# Altium PCB PCB.PcbDoc (part 1 of 2)
Units mm, origin at the board's own origin, x right, y up, seen from the top; angles counter-clockwise.
Board outline 81.5 x 81.5 mm, 2 copper layers (Top Layer, Bottom Layer), stack 1.571 mm thick; 125 components, 80 nets, 407 pads, 356 vias.
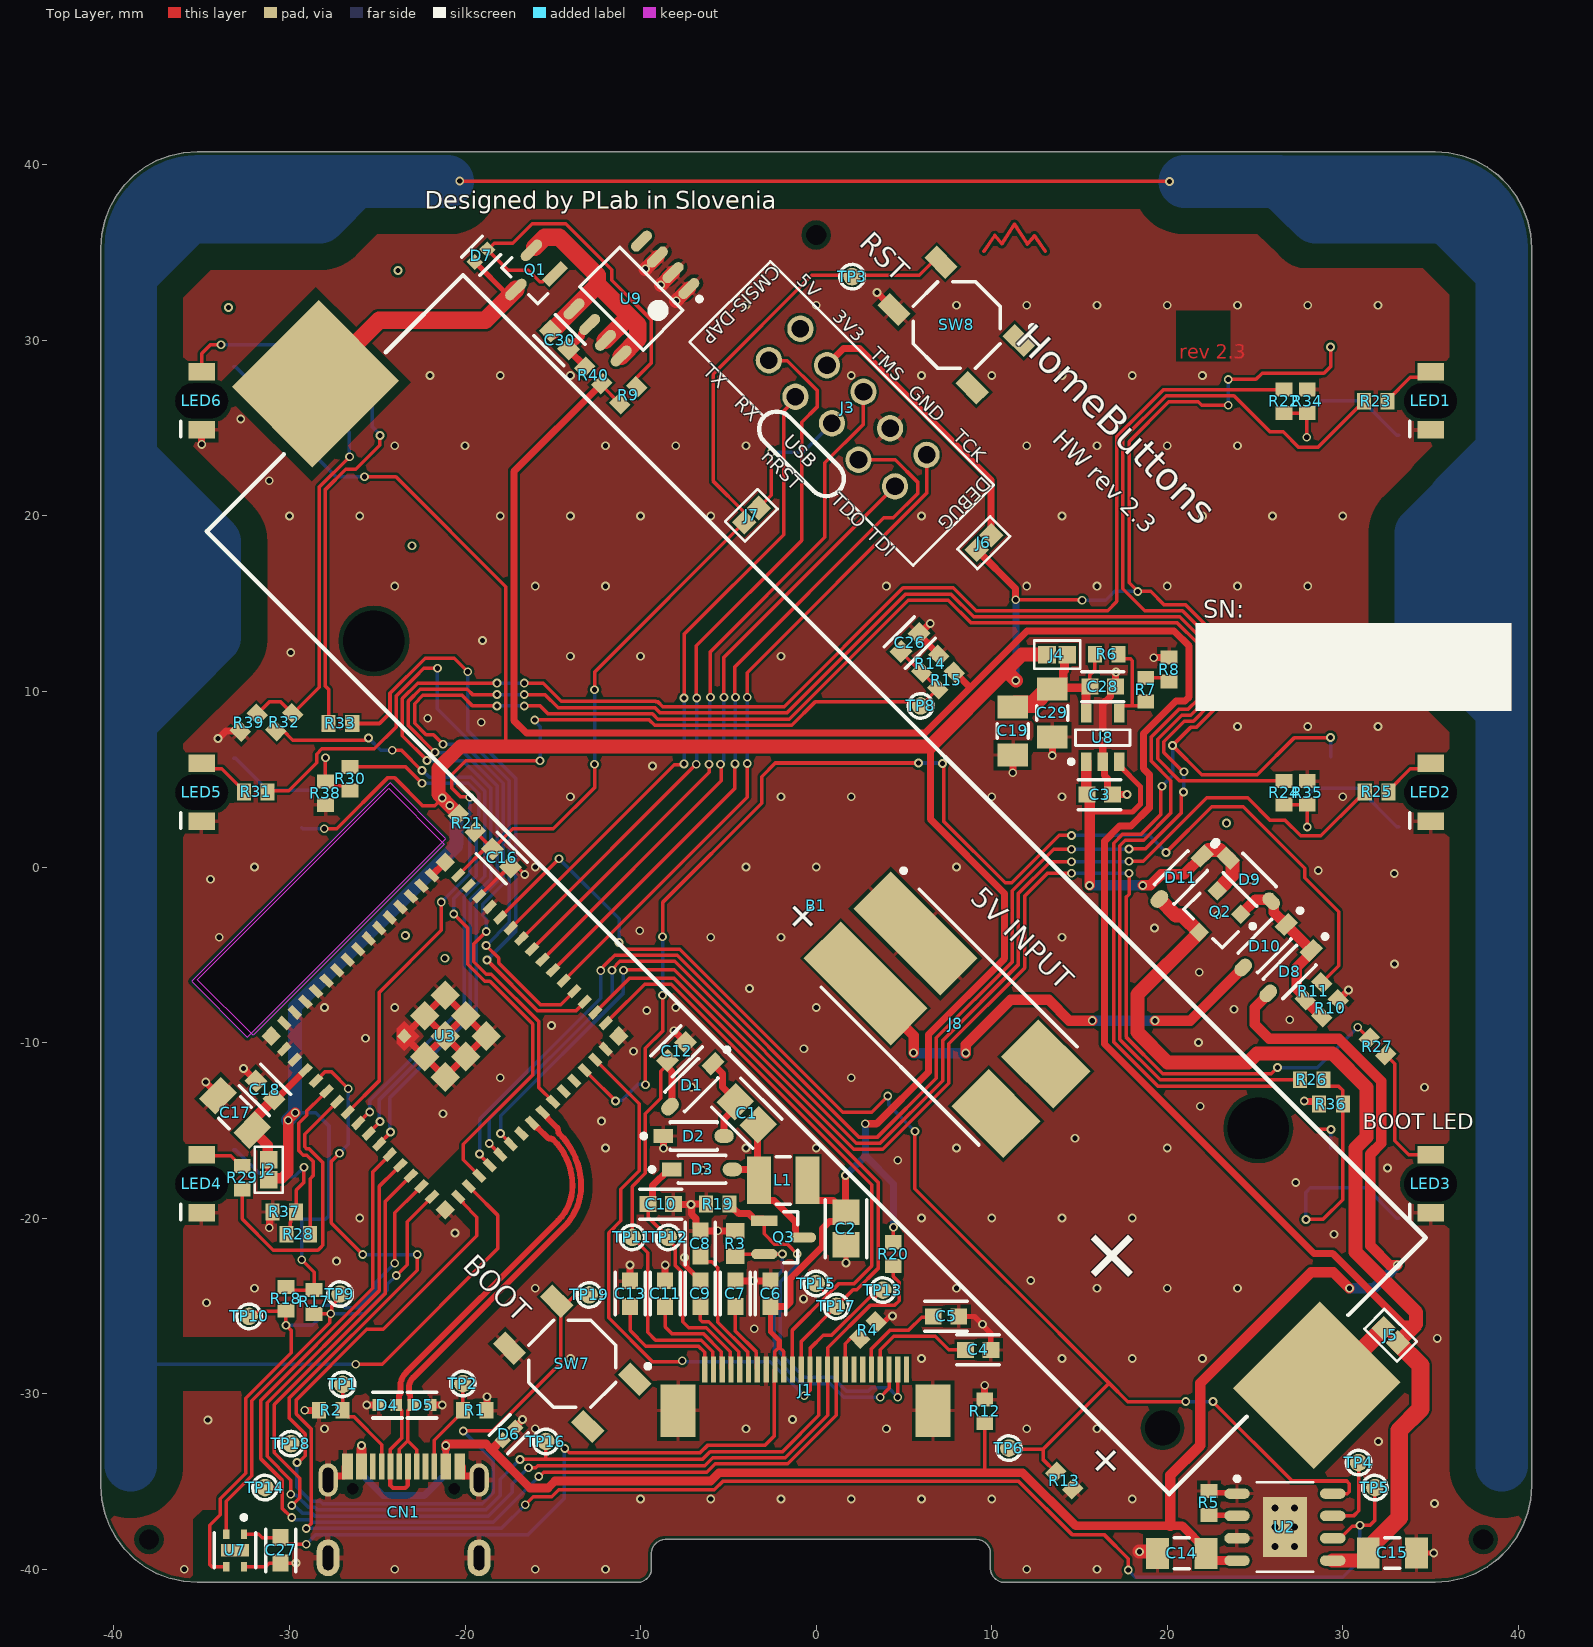
[diagram p0: Top Layer view]
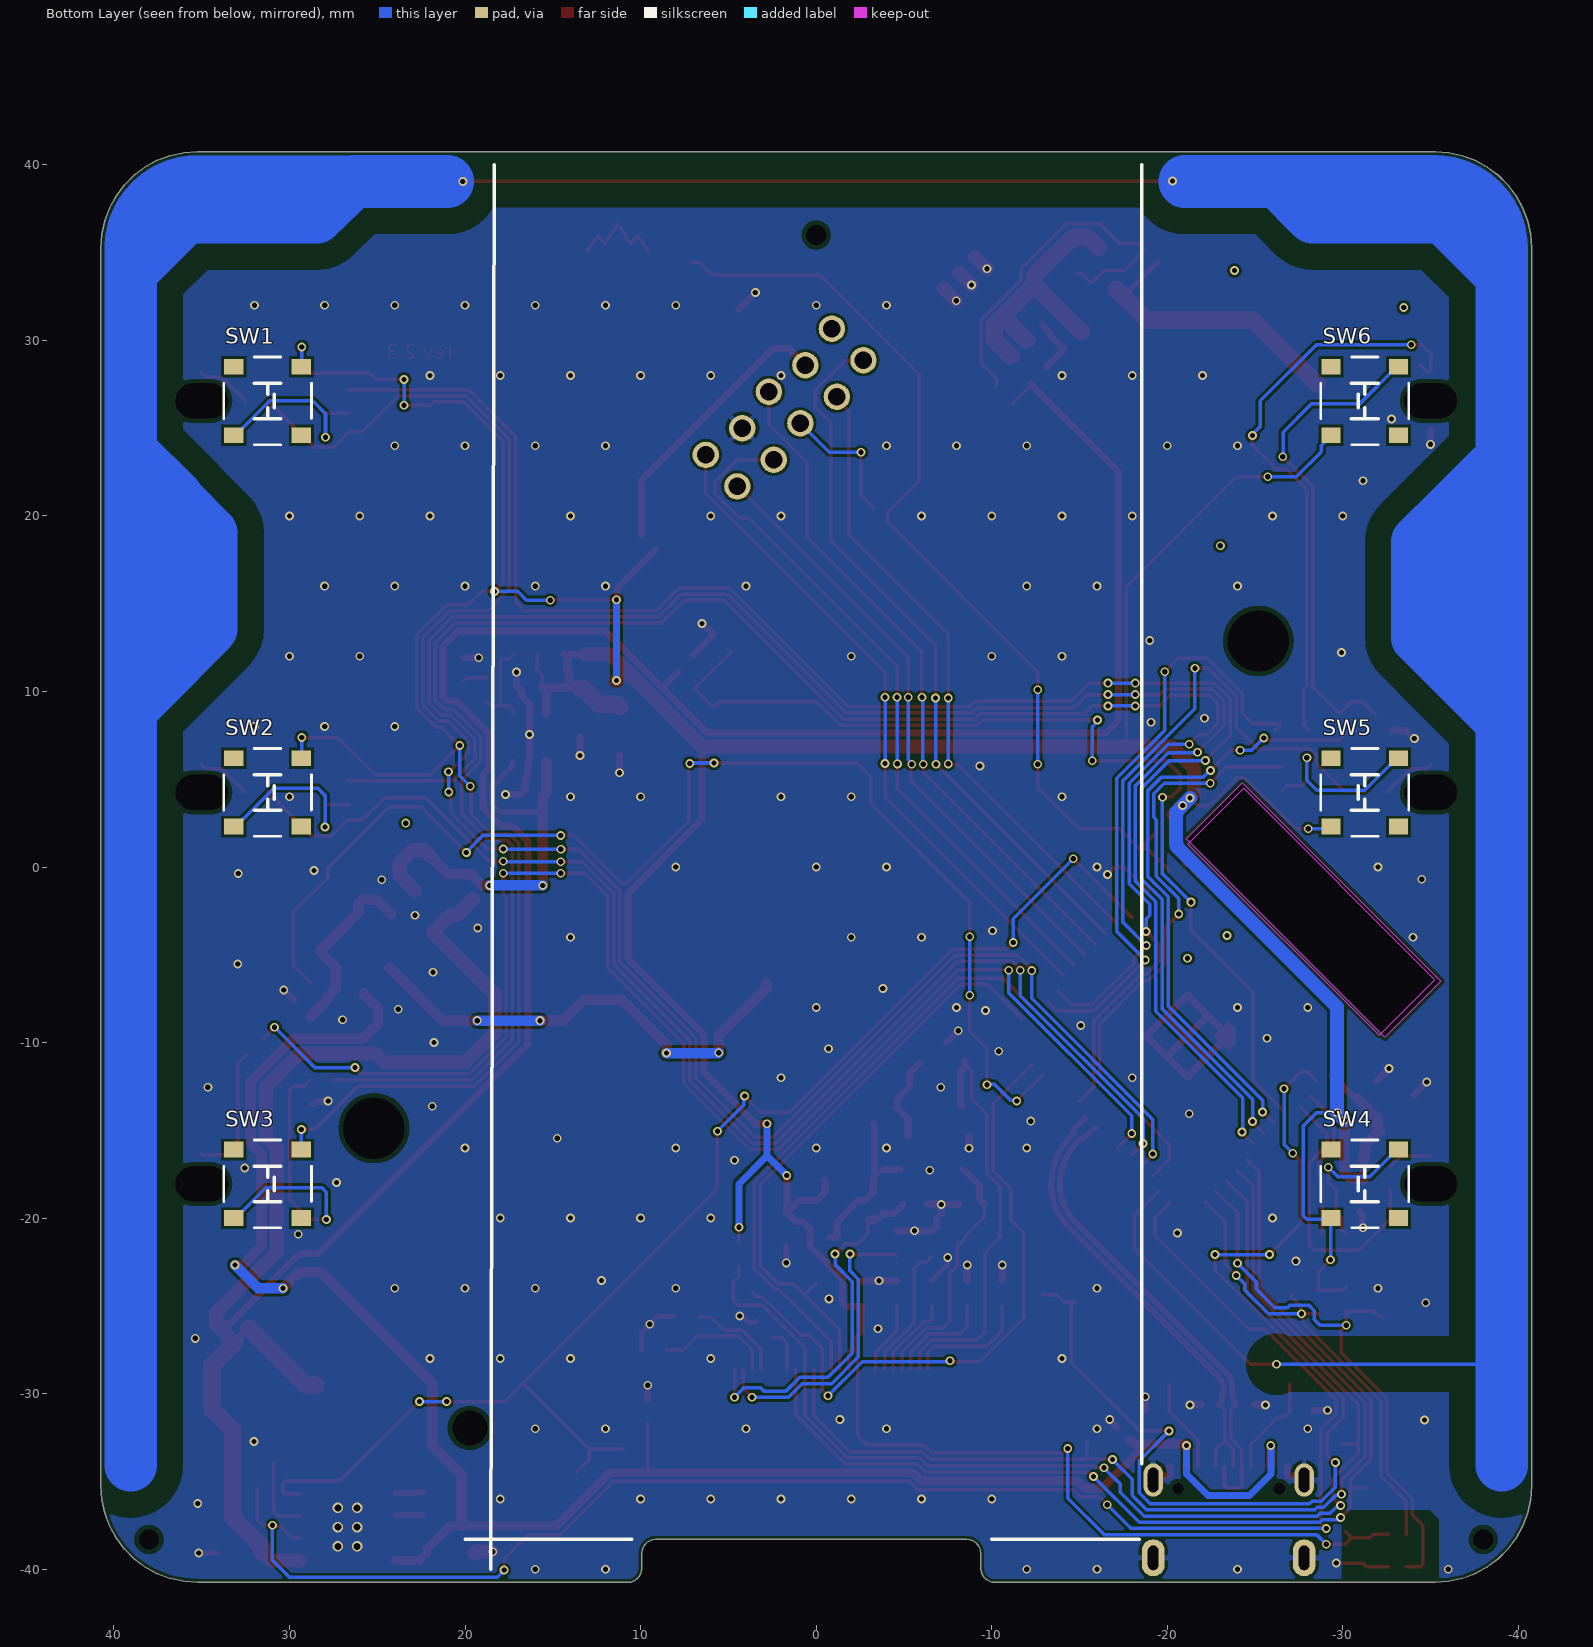
[diagram p1: Bottom Layer view, seen from below]
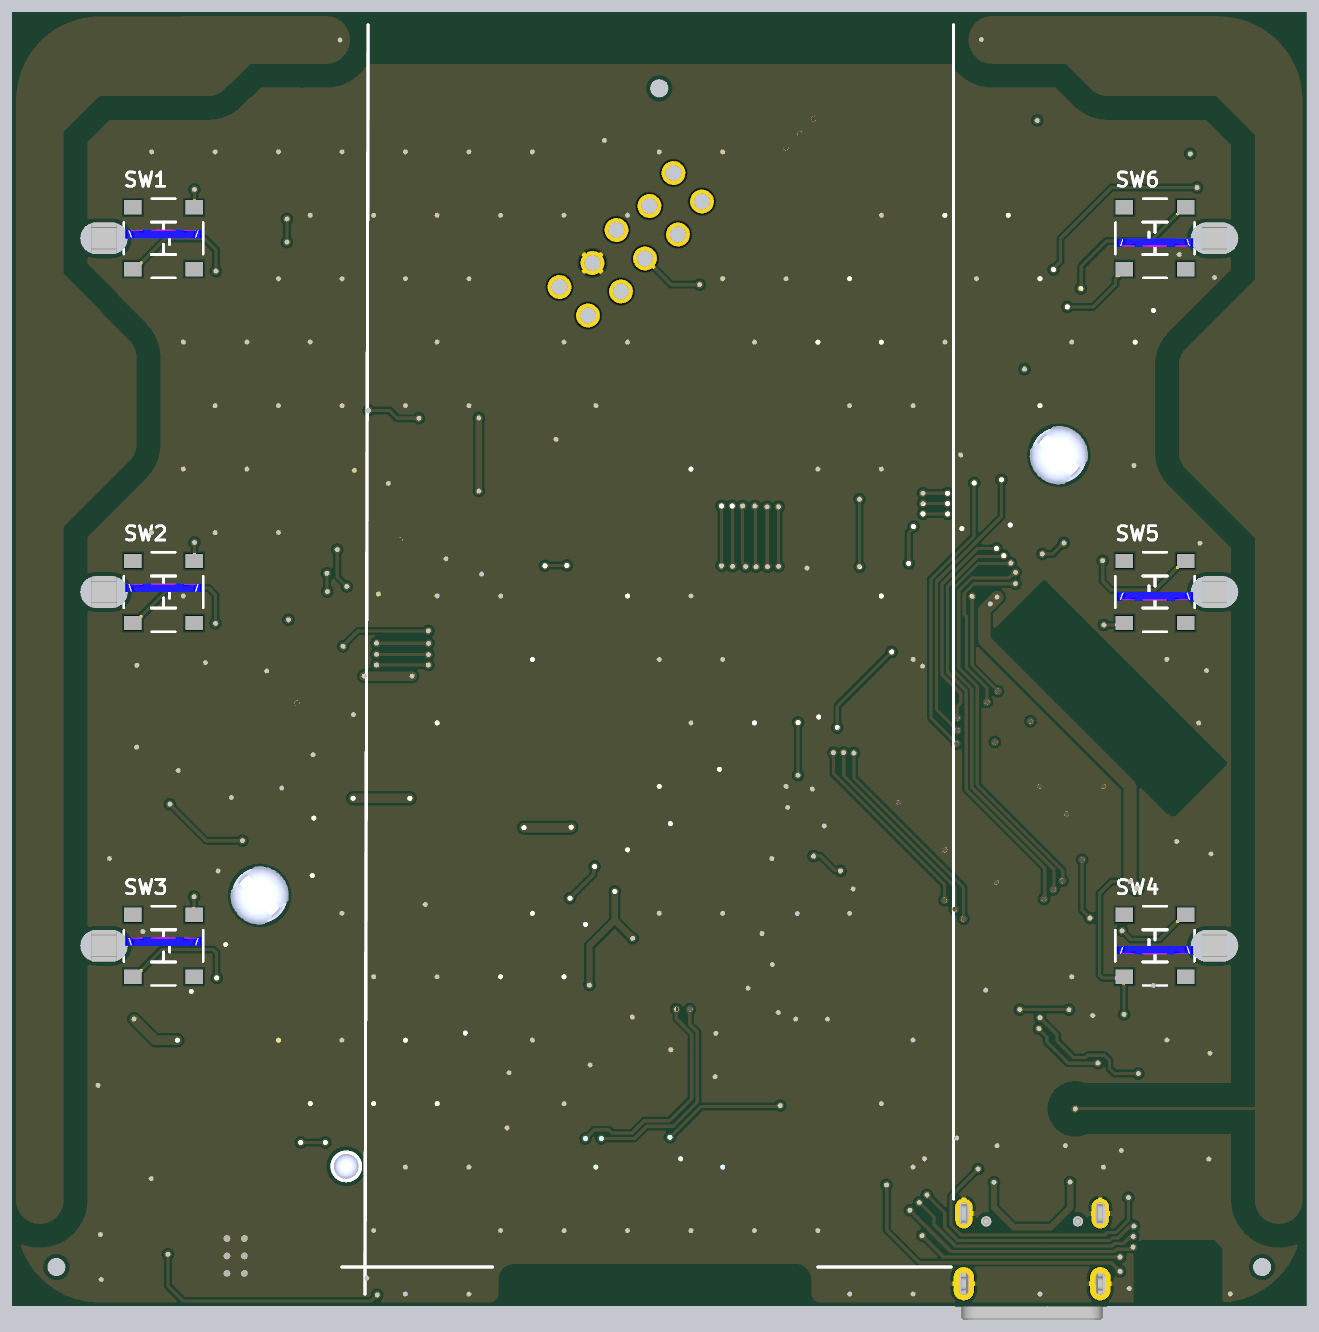
[diagram p3: 3D render of the assembled board from below, using the file's embedded part models]

## Layer stack, top to bottom
Top Solder: solder mask 0.0102, Solder Resist, Dk 3.5
Top Layer: signal copper 0.0356
Dielectric 1: dielectric 1.5, FR-4, Dk 4.8
Bottom Layer: signal copper 0.0356
Bottom Solder: solder mask 0.0102, Solder Resist, Dk 3.5

## Board outline
-35.25,-40.75 -10.18,-40.75 -10.002,-40.73 -9.833,-40.671 -9.681,-40.575 -9.555,-40.449 -9.459,-40.297 -9.4,-40.128 -9.38,-39.95 -9.38,-39.1 -9.36,-38.922 -9.301,-38.753 -9.205,-38.601 -9.079,-38.475 -8.927,-38.379 -8.758,-38.32 -8.58,-38.3 9.13,-38.3 9.308,-38.32 9.477,-38.379 9.629,-38.475 9.755,-38.601 9.851,-38.753 9.91,-38.922 9.93,-39.1 9.93,-39.95 9.95,-40.128 10.009,-40.297 10.105,-40.449 10.231,-40.575 10.383,-40.671 10.552,-40.73 10.73,-40.75 35.25,-40.75 36.033,-40.694 36.8,-40.527 37.535,-40.253 38.224,-39.877 38.852,-39.407 39.407,-38.852 39.877,-38.224 40.253,-37.535 40.527,-36.8 40.694,-36.033 40.75,-35.25 40.75,35.25 40.694,36.033 40.527,36.8 40.253,37.535 39.877,38.224 39.407,38.852 38.852,39.407 38.224,39.877 37.535,40.253 36.8,40.527 36.033,40.694 35.25,40.75 -35.25,40.75 -36.033,40.694 -36.8,40.527 -37.535,40.253 -38.224,39.877 -38.852,39.407 -39.407,38.852 -39.877,38.224 -40.253,37.535 -40.527,36.8 -40.694,36.033 -40.75,35.25 -40.75,-35.25 -40.694,-36.033 -40.527,-36.8 -40.253,-37.535 -39.877,-38.224 -39.407,-38.852 -38.852,-39.407 -38.224,-39.877 -37.535,-40.253 -36.8,-40.527 -36.033,-40.694
cut-out: -32.4,-9.7 -21.086,1.614 -24.268,4.796 -35.582,-6.518

## Design rules (kind name [scope] priority, off if disabled: settings)
BoardOutlineClearance [All] p1: gap=0.2 ignorepadtopadclearanceinfootprint=FALSE
Clearance "proximity track clearance" [InNet('PROXIMITY') vs InNet('GND')] p1: gap=1.5 ignorepadtopadclearanceinfootprint=TRUE
Clearance "usb dif pair track clearance" [(InNet('USB_N') OR InNet('USB_P')) vs InNet('GND')] p2: gap=0.5 ignorepadtopadclearanceinfootprint=TRUE
Clearance [All] p3: gap=0.15 ignorepadtopadclearanceinfootprint=FALSE except(0.25: Arc-Hole Track-Hole THPad-Hole Via-Hole Fill-Hole Poly-Hole Region-Hole Text-Hole)
ComponentClearance [All] p1: gap=0 collisioncheckmode=3 verticalgap=0 showdistances=TRUE
DiffPairsRouting [All] p1: maxlimit=0.15 minlimit=0.15 mostfreqgap=0.15 toplayer_minwidth=0.2 toplayer_maxwidth=0.335 toplayer_prefwidth=0.335 bottomlayer_minwidth=0.2 bottomlayer_maxwidth=0.335 bottomlayer_prefwidth=0.335 impedanceprofiledriven=TRUE impedanceprofileid={C2F5FF65-82FF-485B-A6D6-999E515194F7} impedanceprofilevalue=100.000000 maxuncoupledlength=12.7
Height [All] p1: minheight=0 maxheight=1816.048 prefheight=12.7
HoleSize [All] p1: absolutevalues=TRUE maxlimit=6.3 minlimit=0.3 maxpercent=80.000 minpercent=20.000
HoleToHoleClearance [All] p1: gap=0.25 allowstackedmicrovias=FALSE
MinimumAnnularRing [All] p1: minimumring=0.076
MinimumSolderMaskSliver [All] p1: minsoldermaskwidth=0
PasteMaskExpansion [All] p1: expansion=0 percent=-10.000000
PlaneClearance [All] p1: clearance=0.102
PlaneConnect PlaneConnectPowerPads [InPadClass('PowerPads')] p1: planeconnectstyle=Direct reliefexpansion=0.508 reliefentries=4 reliefconductorwidth=0.254 reliefairgap=0.254
PlaneConnect [All] p2: pad.planeconnectstyle=Relief pad.reliefexpansion=0.3 pad.reliefentries=4 pad.reliefconductorwidth=0.102 pad.reliefairgap=0.102 via.planeconnectstyle=Direct via.reliefexpansion=0.3 via.reliefentries=4 via.reliefconductorwidth=0.127 via.reliefairgap=0.127
PolygonConnect PolygonConnectPowerPads [All vs (InPadClass('PowerPads'))] p1: connectstyle=Direct reliefconductorwidth=0.254 reliefentries=4 polygonreliefangle="90 Angle" airgapwidth=0.254
PolygonConnect [All] p2: thpad.connectstyle=Relief thpad.reliefconductorwidth=0.3 thpad.reliefentries=4 thpad.polygonreliefangle="90 Angle" thpad.airgapwidth=0.2 smdpad.connectstyle=Relief smdpad.reliefconductorwidth=0.2 smdpad.reliefentries=4 smdpad.polygonreliefangle="90 Angle" smdpad.airgapwidth=0.2 via.connectstyle=Direct via.reliefconductorwidth=0.127 via.reliefentries=4 via.polygonreliefangle="90 Angle" via.airgapwidth=0.127
RoutingVias [All] p1: holewidth=0.3 width=0.5 viastyle="Through Hole" minholewidth=0.2 minwidth=0.45 maxholewidth=6.3 maxwidth=6.55
SilkToSilkClearance [All] p1: silktosilkclearance=0
SilkToSolderMaskClearance [IsPad] p1: minsilkscreentomaskgap=0.08 clearancetoexposedcopper=TRUE
SolderMaskExpansion SolderMaskExpansion_VIAS [IsVia] p1: expansion=0.102 istentingtop=TRUE // SolderMask expansion for vias (defines tenting)
SolderMaskExpansion [All] p2: expansion=0.102 istentingtop=FALSE
Width [All] p1: maxlimit=1816.048 minlimit=0.09 preferedwidth=0.102 minimp=50.000000 maximp=50.000000 favimp=50.000000
19 further rules are at their usual default settings.

## Classes and differential pairs
differential pair USB: +USB_P -USB_N

## Components (designator, comment, footprint, x,y, rotation, side; value= is the part's Value field where it differs from the comment)
B1 "18650 Li-Ion Battery" "18650 SMD holder" 0,-1 r315 top locked
C1 "CL21A475KAQNNNE" FP-CL21-IPC_A -3.95,-14.025 r315 top
C2 "CL21A475KAQNNNE" FP-CL21-IPC_A 1.7,-20.6 r270 top
C3 "CL10A105KB8NNNC" FP-CL10B105KO8NNNC-IPC_B 16.15,4.125 r0 top value=1uF
C4 "CL10A105KB8NNNC" FP-CL10B105KO8NNNC-IPC_B 9.225,-27.5 r0 top value=1uF
C5 "CL10A105KB8NNNC" FP-CL10B105KO8NNNC-IPC_B 7.4,-25.6 r0 top value=1uF
C6 "CL10A105KB8NNNC" FP-CL10B105KO8NNNC-IPC_B -2.6,-24.3 r90 top value=1uF
C7 "CL10A105KB8NNNC" FP-CL10B105KO8NNNC-IPC_B -4.6,-24.3 r90 top value=1uF
C8 "CL10A105KB8NNNC" FP-CL10B105KO8NNNC-IPC_B -6.6,-21.45 r90 top value=1uF
C9 "CL10A105KB8NNNC" FP-CL10B105KO8NNNC-IPC_B -6.6,-24.3 r90 top value=1uF
C10 "CL10A105KB8NNNC" FP-CL10B105KO8NNNC-IPC_B -8.85,-19.2 r0 top value=1uF
C11 "CL10A105KB8NNNC" FP-CL10B105KO8NNNC-IPC_B -8.6,-24.3 r90 top value=1uF
C12 "CL10A105KB8NNNC" FP-CL10B105KO8NNNC-IPC_B -7.95,-10.5 r45 top value=1uF
C13 "CL10A105KB8NNNC" FP-CL10B105KO8NNNC-IPC_B -10.6,-24.3 r90 top value=1uF
C14 "CL31A226KPHNNNE" FP-CL31-IPC_B 20.824,-39.1 r180 top
C15 "CL31A226KPHNNNE" FP-CL31-IPC_B 32.825,-39.075 r0 top
C16 "CL10A105KB8NNNC" FP-CL10B105KO8NNNC-IPC_B -17.914,0.514 r315 top value=1uF
C17 "CL31A226KPHNNNE" FP-CL31-IPC_B -33.1,-14 r135 top
C18 "CL10A105KB8NNNC" FP-CL10B105KO8NNNC-IPC_B -31.4,-12.7 r135 top value=1uF
C19 "CL31A226KPHNNNE" FP-CL31-IPC_B 11.2,7.75 r270 top
C26 "CL10A105KB8NNNC" FP-CL10B105KO8NNNC-IPC_B 5.336,12.786 r45 top value=1uF
C27 "CL10A105KB8NNNC" FP-CL10B105KO8NNNC-IPC_B -30.5,-38.925 r270 top value=1uF
C28 "CL10A105KB8NNNC" FP-CL10B105KO8NNNC-IPC_B 16.323,10.275 r0 top value=1uF
C29 "CL31A226KPHNNNE" FP-CL31-IPC_B 13.45,8.775 r270 top
C30 "CL10A105KB8NNNC" FP-CL10B105KO8NNNC-IPC_B -14.614,30.014 r135 top value=1uF
CN1 "XKB U262-161N-4BVC11" "XKB U262-161N-4BVC11" -23.5,-41.7 r0 top
D1 "MBR0530" FP-425-04-IPC_B -7.1,-12.425 r225 top
D2 "MBR0530" FP-425-04-IPC_B -6.975,-15.325 r0 top
D3 "MBR0530" FP-425-04-IPC_B -6.5,-17.225 r0 top
D4 "LXES15AAA1-133" FP-LXES15-IPC_A -24.425,-30.65 r0 top
D5 "LXES15AAA1-133" FP-LXES15-IPC_A -22.45,-30.65 r180 top
D6 "LXES15AAA1-133" FP-LXES15-IPC_A -17.5,-32.3 r225 top
D7 "LXES15AAA1-133" FP-LXES15-IPC_A -19.081,34.819 r45 top
D8 "MBR0530" FP-425-04-IPC_B 26.975,-5.975 r225 top
D9 "MBR0530" FP-425-04-IPC_B 24.7,-0.725 r315 top
D10 "MBR0530" FP-425-04-IPC_B 25.55,-4.5 r225 top
D11 "MBR0530" FP-425-04-IPC_B 20.775,-0.6 r225 top
J1 "XFCN F0501-T-24-20T-R" "XFCN F0501-T-24-20T-R" -0.6,-28.4 r0 top locked
J2 "SolderJumper" SolderJumper_1mm -31.175,-17.825 r270 top
J3 "DEBUG" "muselab cmsis-dap frictionfit" 2.696,27.071 r225 top
J4 "SolderJumper" SolderJumper_1mm 13.15,12.1 r180 top
J5 "SolderJumper" SolderJumper_1mm 33.138,-27.088 r315 top
J6 "SolderJumper" SolderJumper_1mm 9.963,18.888 r45 top
J7 "SolderJumper" SolderJumper_1mm -3.275,20.45 r45 top
J8 "2060-452/998-404" WAGO-2060-452_V 8.125,-9.1 r315 top locked
L1 "CMI322513J680MT" FP-DFE322512C-IPC_B -1.875,-17.85 r180 top value=68uH
LED1 "Everlight Elec 23-21B/T1D-CP2Q2TY/2A" "Everlight Elec 23-21B/T1D-CP2Q2TY/2A" 35,26.55 r90 top locked
LED2 "Everlight Elec 23-21B/T1D-CP2Q2TY/2A" "Everlight Elec 23-21B/T1D-CP2Q2TY/2A" 35,4.25 r90 top locked
LED3 "Everlight Elec 23-21B/T1D-CP2Q2TY/2A" "Everlight Elec 23-21B/T1D-CP2Q2TY/2A" 35,-18.05 r90 top locked
LED4 "Everlight Elec 23-21B/T1D-CP2Q2TY/2A" "Everlight Elec 23-21B/T1D-CP2Q2TY/2A" -35,-18.05 r90 top locked
LED5 "Everlight Elec 23-21B/T1D-CP2Q2TY/2A" "Everlight Elec 23-21B/T1D-CP2Q2TY/2A" -35,4.25 r90 top locked
LED6 "Everlight Elec 23-21B/T1D-CP2Q2TY/2A" "Everlight Elec 23-21B/T1D-CP2Q2TY/2A" -35,26.55 r90 top locked
Q1 "BM3402" FP-SOT23-IPC_B -16.325,33.675 r225 top
Q2 "AO3401A" AO-SOT-23-3L_V 22.675,-2.875 r225 top
Q3 "BM3402" FP-SOT23-IPC_B -1.85,-21.1 r0 top
R1 "0603WAF5101T5E" RESC1608X55X30NL15T15 -19.45,-30.95 r180 top value=5k1
R2 "0603WAF5101T5E" RESC1608X55X30NL15T15 -27.65,-30.95 r0 top value=5k1
R3 "0603WAF220KT5E" RESC1608X55X30ML15T15 -4.6,-21.45 r90 top value=2R2
R4 "0603WAF1004T5E" RESC1608X55X30NL15T15 2.95,-26.375 r225 top value=1M
R5 "0603WAF1501T5E" RESC1608X55X30NL15T15 22.375,-36.225 r270 top value=1k5
R6 "0603WAF2203T5E" RESC1608X55X30NL15T15 16.55,12.125 r180 top value=220k
R7 "0603WAF7502T5E" RESC1608X55X30NL15T15 18.775,10.1 r270 top value=75k
R8 "0603WAF1501T5E" RESC1608X55X30NL15T15 20.1,11.25 r270 top value=1k5
R9 "0603WAF1501T5E" RESC1608X55X30NL15T15 -10.7,26.875 r225 top value=1k5
R10 "0603WAF5101T5E" RESC1608X55X30NL15T15 29.275,-8.05 r225 top value=5k1
R11 "0603WAF1004T5E" RESC1608X55X30NL15T15 28.325,-7.075 r45 top value=1M
R12 "0603WAF5101T5E" RESC1608X55X30NL15T15 9.6,-31 r270 top value=5k1
R13 "0603WAF5101T5E" RESC1608X55X30NL15T15 14.127,-34.952 r135 top value=5k1
R14 "0603WAF1004T5E" RESC1608X55X30NL15T15 6.498,11.573 r225 top value=1M
R15 "0603WAF1004T5E" RESC1608X55X30NL15T15 7.4,10.625 r45 top value=1M
R17 "0603WAF1501T5E" RESC1608X55X30NL15T15 -28.6,-24.775 r90 top value=1k5
R18 "0603WAF1501T5E" RESC1608X55X30NL15T15 -30.2,-24.6 r90 top value=1k5
R19 "0603WAF1501T5E" RESC1608X55X30NL15T15 -5.6,-19.2 r0 top value=1k5
R20 "0603WAF1004T5E" RESC1608X55X30NL15T15 4.4,-22.05 r270 top value=1M
R21 "0603WAF1501T5E" RESC1608X55X30NL15T15 -19.9,2.5 r135 top value=1k5
R22 "0603WAF1004T5E" RESC1608X55X30NL15T15 26.65,26.525 r270 top value=1M
R23 "0603WAF100JT5E" RESC1608X55X30NL15T15 31.875,26.525 r0 top value=10
R24 "0603WAF1004T5E" RESC1608X55X30NL15T15 26.65,4.225 r270 top value=1M
R25 "0603WAF100JT5E" RESC1608X55X30NL15T15 31.925,4.275 r0 top value=10
R26 "0603WAF1004T5E" RESC1608X55X30NL15T15 28.225,-12.125 r0 top value=1M
R27 "0603WAF100JT5E" RESC1608X55X30NL15T15 31.975,-10.225 r315 top value=10
R28 "0603WAF1004T5E" RESC1608X55X30NL15T15 -29.5,-20.925 r180 top value=1M
R29 "0603WAF100JT5E" RESC1608X55X30NL15T15 -32.7,-17.7 r90 top value=10
R30 "0603WAF1004T5E" RESC1608X55X30NL15T15 -26.55,5.025 r270 top value=1M
R31 "0603WAF100JT5E" RESC1608X55X30NL15T15 -31.925,4.275 r180 top value=10
R32 "0603WAF1004T5E" RESC1608X55X30NL15T15 -30.3,8.25 r225 top value=1M
R33 "0603WAF100JT5E" RESC1608X55X30NL15T15 -27.1,8.175 r180 top value=10
R34 "0603WAF5101T5E" RESC1608X55X30NL15T15 27.975,26.525 r270 top value=5k1
R35 "0603WAF5101T5E" RESC1608X55X30NL15T15 27.975,4.225 r270 top value=5k1
R36 "0603WAF5101T5E" RESC1608X55X30NL15T15 29.325,-13.5 r0 top value=5k1
R37 "0603WAF5101T5E" RESC1608X55X30NL15T15 -30.3,-19.65 r0 top value=5k1
R38 "0603WAF5101T5E" RESC1608X55X30NL15T15 -27.95,4.2 r90 top value=5k1
R39 "0603WAF5101T5E" RESC1608X55X30NL15T15 -32.325,8.225 r45 top value=5k1
R40 "0603WAF1501T5E" RESC1608X55X30NL15T15 -12.7,28 r315 top value=1k5
SW1 "Alps SKRB" "Alps SKRB" 31.25,26.55 r0 bottom locked
SW2 "Alps SKRB" "Alps SKRB" 31.25,4.25 r0 bottom locked
SW3 "Alps SKRB" "Alps SKRB" 31.25,-18.05 r0 bottom
SW4 "Alps SKRB" "Alps SKRB" -31.25,-18.05 r180 bottom locked
SW5 "Alps SKRB" "Alps SKRB" -31.25,4.25 r180 bottom locked
SW6 "Alps SKRB" "Alps SKRB" -31.25,26.55 r180 bottom locked
SW7 "TS-1187A-B-A-B" ESWI-TL3342F160QG_V -13.9,-28.3 r225 top
SW8 "TS-1187A-B-A-B" ESWI-TL3342F160QG_V 8,30.875 r225 top
TP1 "test point 1.5mm" TP1_FULL -26.975,-29.475 r0 top
TP2 "test point 1.5mm" TP1_FULL -20.125,-29.425 r90 top
TP3 "test point 1.5mm" TP1_FULL 2.05,33.625 r90 top
TP4 "test point 1.5mm" TP1_FULL 30.9,-33.925 r90 top
TP5 "test point 1.5mm" TP1_FULL 31.825,-35.35 r90 top
TP6 "test point 1.5mm" TP1_FULL 10.975,-33.1 r90 top
TP8 "test point 1.5mm" TP1_FULL 5.95,9.175 r90 top
TP9 "test point 1.5mm" TP1_FULL -27.125,-24.325 r90 top
TP10 "test point 1.5mm" TP1_FULL -32.3,-25.6 r90 top
TP11 "test point 1.5mm" TP1_FULL -10.475,-21.1 r90 top
TP12 "test point 1.5mm" TP1_FULL -8.425,-21.1 r90 top
TP13 "test point 1.5mm" TP1_FULL 3.8,-24.1 r90 top
TP14 "test point 1.5mm" TP1_FULL -31.4,-35.35 r90 top
TP15 "test point 1.5mm" TP1_FULL 0,-23.725 r90 top
TP16 "test point 1.5mm" TP1_FULL -15.4,-32.725 r90 top
TP17 "test point 1.5mm" TP1_FULL 1.15,-25.025 r90 top
TP18 "test point 1.5mm" TP1_FULL -29.925,-32.85 r90 top
TP19 "test point 1.5mm" TP1_FULL -12.925,-24.375 r90 top
U2 "TP4056" "Generic SOP8-PP" 26.7,-37.6 r0 top
U3 "ESP32-S2-MINI-2-N4" XCVR_ESP32-S2-MINI-1 -21.137,-9.628 r45 top locked
U7 "SHTC3" FP-SHTC3-MFG -33.1,-38.925 r270 top
U8 "AP7365" "Diodes Inc SOT25" 16.325,7.375 r90 top
U9 "XB8608AF" "generic sop8" -10.524,32.378 r225 top

## Footprints (in the part's own frame and the unit in brackets; to place one, negate y for a bottom-side part, rotate by r counter-clockwise, add the part's x,y. Pads: shape width x height; smd on the part's side, far side on the other; paste and mask are expansions set on the pad)
"18650 SMD holder" [mm] "18650 SMD + THT holder"
  round 0 hole 2 unplated: H1(35.839,-7.937)
  round 0 hole 3.5 unplated: H2(27.623,8.001) H3(-27.623,-8.001)
  rect 6.5x7 smd: NEG(-40.334,0) POS(40.334,0)
  silkscreen extent -38.78,-10.33 38.78,10.33, body extent -43,-10.33 43,10.33, height 14.86
"Alps SKRB" [mm] "Alps SKRB SMD tactile button"
  rect 1.1x0.9 smd mask+0.05: 1(-1.925,1.95) 2(-1.925,-1.95) 3(1.925,1.95) 4(1.925,-1.95)
  silkscreen extent -2.5,-2.5 2.5,2.5, body extent -2.4,-2.4 2.4,2.4, height 0.55
AO-SOT-23-3L_V [mm] "SOT23, 3-Leads, Body 3.1x1.8mm, Pitch 0.95mm"
  rect 0.8x0.8 smd: 1(-1.2,0.95) 2(-1.2,-0.95) 3(1.2,0)
  silkscreen extent -1.32,-1.55 0.9,2.02, body extent -1.5,-1.55 1.5,1.55, height 1.25
"Diodes Inc SOT25" [mm] "SOT23, 5-Leads, Body 3.00x2.85mm, Pitch 0.95mm, IPC Medium Density"
  rect 1.05x0.6 smd: 1(-1.375,0.95) 2(-1.375,0) 3(-1.375,-0.95) 4(1.375,-0.95) 5(1.375,0.95)
  silkscreen extent -1.5,-1.55 0.45,1.92, body extent -1.5,-1.55 1.5,1.55, height 1.3
ESWI-TL3342F160QG_V [mm] "SMD, 4-Leads, Body 5x5mm, Pitch 6.3mm"
  rect 1x1.7 smd: 1(-1.9,3.15) 2(-1.9,-3.15) 3(1.9,3.15) 4(1.9,-3.15)
  silkscreen extent -3.07,-2.5 2.5,3.27, body extent -2.5,-2.5 2.5,2.5, height 1.5
"Everlight Elec 23-21B/T1D-CP2Q2TY/2A" [mm] "Reverse mount SMD LED, cool white"
  rect 1x1.5 smd: 1(1.65,0) 2(-1.65,0)
  round 0 hole 2 slot 3 at 90 deg unplated: 4(0,0)
  silkscreen extent -2.05,1.2 -1.15,1.2, body extent -1.6,-0.8 1.6,0.8, height 0.32
FP-425-04-IPC_B [mm]
  rect 1.108x0.782 smd paste+0 mask+0: 1(-1.73,0)
  rrect100% 1.108x0.782 smd paste+0 mask+0: 2(1.73,0)
  silkscreen extent -2.97,-0.8 1.35,0.8
FP-CL10B105KO8NNNC-IPC_B [mm]
  rect 0.958x0.912 smd paste+0 mask+0: 1(-0.727,0) 2(0.727,0)
  silkscreen extent -1.21,-0.86 1.21,0.86, body extent -1.46,-0.71 1.46,0.71, height 0.25
FP-CL21-IPC_A [mm]
  rect 1.455x1.556 smd paste+0 mask+0: 1(-0.926,0) 2(0.926,0)
  silkscreen extent -1.65,-1.18 1.65,1.18, body extent -2.15,-1.28 2.15,1.28, height 0.25
FP-CL31-IPC_B [mm]
  rect 1.305x1.758 smd paste+0 mask+0: 1(-1.376,0) 2(1.376,0)
  silkscreen extent -0.42,-0.88 0.42,0.88, body extent -2.28,-1.13 2.28,1.13, height 0.25
FP-DFE322512C-IPC_B [mm]
  rect 1.355x2.706 smd paste+0 mask+0: 1(-1.376,0) 2(1.376,0)
  silkscreen extent -0.4,-1.35 0.4,1.35, body extent -2.3,-1.6 2.3,1.6, height 0.25
FP-LXES15-IPC_A [mm]
  rect 0.665x0.672 smd paste+0 mask+0: 1(-0.504,0) 2(0.504,0)
  silkscreen extent -0.84,-0.74 0.84,0.74
FP-SHTC3-MFG [mm]
  rect 0.55x0.35 smd paste-1000 mask-1000: 1(-0.925,0.5) 2(-0.925,-0.5) 3(0.925,-0.5) 4(0.925,0.5)
  rect 0.7x1.6 smd paste-1000 mask+0: 5(0,0)
  silkscreen extent -2,-1.17 1,1.17, body extent -1.4,-1.1 1.4,1.1, height 0.25
FP-SOT23-IPC_B [mm]
  rect 1.505x0.572 smd paste+0 mask+0: 1(-1.1,0.95)
  rrect100% 1.505x0.572 smd paste+0 mask+0: 2(-1.1,-0.95) 3(1.1,0)
  silkscreen extent 0,-1.45 0.8,1.45, body extent -2.1,-1.7 2.1,1.7, height 0.25
"generic sop8" [mm] "designed for  XB8608AF"
  oval 1.45x0.6 smd: 1(-2.725,1.905) 2(-2.725,0.635) 3(-2.725,-0.635) 4(-2.725,-1.905) 5(2.725,-1.905) 6(2.725,-0.635) 7(2.725,0.635) 8(2.725,1.905)
  silkscreen extent -2.85,-2.55 1.6,2.88, body extent -3,-2.55 3,2.55, height 1.75
"Generic SOP8-PP" [mm] "generic SOP8-PP for TP4056"
  oval 1.45x0.6 smd: 1(-2.725,1.905) 2(-2.725,0.635) 3(-2.725,-0.635) 4(-2.725,-1.905) 5(2.725,-1.905) 6(2.725,-0.635) 7(2.725,0.635) 8(2.725,1.905)
  rect 2.52x3.41 smd: 9(0,0)
  silkscreen extent -2.85,-2.55 1.6,2.88, body extent -3,-2.55 3,2.55, height 1.75
"muselab cmsis-dap frictionfit" [mm]
  round 1.5 hole 1: 1(0,5.08) 2(0.4,2.54) 3(0,0) 4(0.4,-2.54) 5(0,-5.08) 6(2.54,-5.08) 7(2.94,-2.54) 8(2.54,0) 9(2.94,2.54) 10(2.54,5.08)
  silkscreen extent -1.5,-9 6,9
RESC1608X55X30ML15T15 [mm] "Chip Resistor, 2-Leads, Body 1.60x0.80mm, IPC Low Density"
  rect 0.9x1.05 smd: 1(-0.725,0) 2(0.725,0)
  body extent -0.87,-0.48 0.87,0.48, height 0.55
RESC1608X55X30NL15T15 [mm] "Chip Resistor, 2-Leads, Body 1.60x0.80mm, IPC Medium Density"
  rect 0.8x0.95 smd: 1(-0.675,0) 2(0.675,0)
  body extent -0.87,-0.48 0.87,0.48, height 0.55
SolderJumper_1mm [mm]
  rect 1x1 smd: 1(-1.15,0) 2(0,0)
  silkscreen extent -1.9,-0.8 0.73,0.8
TP1_FULL [mm]
  round 1 smd paste-0.5: 1(0,0)
  silkscreen extent -0.7,-0.7 0.7,0.7
WAGO-2060-452_V [mm] "Terminal Block, 2-Leads, Body 12.7x7.9mm, Pitch 4mm"
  rect 7x3 smd: 1(-5.5,2) 2(-5.5,-2)
  rect 4.2x3 smd: MP1(5,2) MP2(5,-2)
  silkscreen extent -8.63,-3.95 5.58,4.19, body extent -7.37,-3.94 5.73,3.96, height 4.35
XCVR_ESP32-S2-MINI-1 [mm]
  rect 0.8x0.4 smd: 1(-7,5.95) 2(-7,5.1) 3(-7,4.25) 4(-7,3.4) 5(-7,2.55) 6(-7,1.7) 7(-7,0.85) 8(-7,0) 9(-7,-0.85) 10(-7,-1.7) 11(-7,-2.55) 12(-7,-3.4) 13(-7,-4.25) 14(-7,-5.1) 15(-7,-5.95) 31(7,-5.95) 32(7,-5.1) 33(7,-4.25) 34(7,-3.4) 35(7,-2.55) 36(7,-1.7) 37(7,-0.85) 38(7,0) 39(7,0.85) 40(7,1.7) 41(7,2.55) 42(7,3.4) 43(7,4.25) 44(7,5.1) 45(7,5.95)
  rect 0.4x0.8 smd: 16(-5.95,-7) 17(-5.1,-7) 18(-4.25,-7) 19(-3.4,-7) 20(-2.55,-7) 21(-1.7,-7) 22(-0.85,-7) 23(0,-7) 24(0.85,-7) 25(1.7,-7) 26(2.55,-7) 27(3.4,-7) 28(4.25,-7) 29(5.1,-7) 30(5.95,-7) 46(5.95,7) 47(5.1,7) 48(4.25,7) 49(3.4,7) 50(2.55,7) 51(1.7,7) 52(0.85,7) 53(0,7) 54(-0.85,7) 55(-1.7,7) 56(-2.55,7) 57(-3.4,7) 58(-4.25,7) 59(-5.1,7) 60(-5.95,7)
  rect 1.2x1.2 smd: 61(0,0) 61_1(-1.65,0) 61_2(-1.65,-1.65) 61_3(0,-1.65) 61_4(1.65,-1.65) 61_5(1.65,0) 61_6(1.65,1.65) 61_7(0,1.65)
  rect 0.6x0.6 smd paste-1 mask+0: 61_8(-1.65,1.65)
  rect 0.8x0.8 smd: 62(-7,7) 63(-7,-7) 64(7,-7) 65(7,7)
  Top Layer region: -1.05,1.05 -2.25,1.05 -2.25,1.65 -1.65,2.25 -1.05,2.25
  Keep-Out Layer region: 7.7,7.75 -7.7,7.75 -7.7,12.25 7.7,12.25
  Keep-Out Layer region: 7.7,7.75 -7.7,7.75 -7.7,12.25 7.7,12.25
  body extent -7.7,-7.75 7.7,12.25, height 2.55
"XFCN F0501-T-24-20T-R" [mm]
  rect 0.3x1.5 smd mask+0.05: 1(5.75,-0.219) 2(5.25,-0.219) 3(4.75,-0.219) 4(4.25,-0.219) 5(3.75,-0.219) 6(3.25,-0.219) 7(2.75,-0.219) 8(2.25,-0.219) 9(1.75,-0.219) 10(1.25,-0.219) 11(0.75,-0.219) 12(0.25,-0.219) 13(-0.25,-0.219) 14(-0.75,-0.219) 15(-1.25,-0.219) 16(-1.75,-0.219) 17(-2.25,-0.219) 18(-2.75,-0.219) 19(-3.25,-0.219) 20(-3.75,-0.219) 21(-4.25,-0.219) 22(-4.75,-0.219) 23(-5.25,-0.219) 24(-5.75,-0.219)
  rect 2x3 smd: MP1(-7.265,-2.569) MP2(7.265,-2.569)
  body extent -8.25,-5.22 8.25,0, height 2.15
"XKB U262-161N-4BVC11" [mm] "USB Type-C connector XKB  U262-161N-4BVC11"
  rect 0.32x1.5 smd mask+0.05: A1(-3.35,7.55) A4(-2.55,7.55) A5(-1.25,7.55) A6(-0.25,7.55) A7(0.25,7.55) A8(1.25,7.55) A9(2.55,7.55) A12(3.35,7.55) B1(3.05,7.55) B4(2.25,7.55) B5(1.75,7.55) B6(0.75,7.55) B7(-0.75,7.55) B8(-1.75,7.55) B9(-2.25,7.55) B12(-3.05,7.55)
  round 0 hole 0.65 unplated mask+0.05: H1(-2.89,6.28) H2(2.89,6.28)
  oval 1.1x1.9 hole 0.6 slot 1.4 at 90 deg mask+0.05: SHELL1(-4.3,6.78) SHELL2(4.3,6.78)
  oval 1.3x2.1 hole 0.6 slot 1.4 at 90 deg mask+0.05: SHELL3(-4.3,2.35) SHELL4(4.3,2.35)
  body extent -4.45,0.05 4.45,7.61, height 3.3

## Part data
B1: "Lithium 18650 battery cell"
C1 C2: library part CMP-13271-002624-1, "CL21 Series 0805 4.7uF 25V ±10% Tolerance X5R Multilayer Ceramic Chip Capacitor", Capacitance=4.7uF, Case Code (Imperial)=0805, Case Code (Metric)=2012, Dielectric=X5R, LCSC=C1779, Max Operating Temperature=85°C, Min Operating Temperature=-55°C, Package Quantity=1, Tolerance=10%, Voltage Rating=25V, Case/Package=0805, Depth=1.25mm, Height=1.25mm, Lead Free="Lead Free", Length=2mm, Mount="Surface Mount", Packaging="Tape and Reel", Radiation Hardening=No, Thickness=0.055inch, Voltage Rating (DC)=25V, Width=0.049inch
C3 C4 C5 C6 C7 C8 C9 C10 C11 C12 C13 C16 C18 C26 C27 C28 C30: library part CMP-2000-06093-2, "CAP CER 1UF 50V X5R 0603", Capacitance=1uF, LCSC=C15849, Manufacturer="Samsung Electro-Mechanics America, Inc", Manufacturer Part Number=CL10B105KO8NNNC, Temperature="-55°C to +125°C", Temperature Characteristic=X5R, Temperature Coefficient=15%, Temperature Range High=+125°C, Temperature Range Low=-55°C, Tolerance=10%, Voltage Rating=50V, Automotive=No, Category=Cap, ComponentLink2Description=Datasheet, ComponentLink2URL=http://www.samsungsem.com/global/front/downloadcms.do?path=%2F%2Fglobal%2F%2Fsupport%2F%2Fproduct-search%2F%2Fmlcc%2F%2F__icsFiles%2F%2Fafieldfile%2F%2F2019%2F%2F06%2F%2F18&fileName=CL10B105KO8NNNC-19.pdf, Device Class L1="Passive Components", Device Class L2=Capacitors, Device Class L3="Ceramic Capacitors", Digikey Description="CAP CER 1UF 16V X7R 0603", Height=0.9mm, Ipc Land Pattern Name=CAPC16080X80, Lead Free=Yes, Material=Ceramic, Octopart=https://octopart.com/cl10b105ko8nnnc-samsung-19018973, Package=CL10B105KO8NNNC, RoHS=TRUE
C14 C15 C17 C19 C29: library part CMP-13271-002604-1, "Cap Ceramic 22uF 10V X5R ±10% SMD 1206", Capacitance=22uF, Case Code (Imperial)=1206, Case Code (Metric)=3216, Dielectric=X5R, LCSC=C5672, Max Operating Temperature=85°C, Min Operating Temperature=-55°C, Package Quantity=1, Tolerance=10%, Voltage Rating=10V, Case/Package=1206, Depth=1.6mm, Height=1.6mm, Lead Free="Lead Free", Length=3.2mm, Mount="Surface Mount", Packaging="Tape and Reel", Radiation Hardening=No, Thickness=0.071inch, Voltage Rating (DC)=10V, Width=0.063inch
CN1: "USB Type-C connector, USB-2.0, 16 pins", LCSC=C319148
D1 D2 D3 D8 D9 D10 D11: library part CMP-2000-05113-2, "DIODE SCHOTTKY 30V 500MA SOD123", Average Rectified Current=500mA, Forward Voltage=430mV, LCSC=C77336, Max Forward Surge Current (Ifsm)=5.5A, Max Operating Temperature=150°C, Max Repetitive Reverse Voltage (Vrrm)=30V, Max Reverse Leakage Current=130uA, Min Operating Temperature=-65°C, Package Quantity=1, Contact Plating=Tin, Current Rating=500mA, Element Configuration=Single, Forward Current=500mA, Height=1.03mm, Lead Free="Lead Free", Length=2.7mm, Max Reverse Voltage (DC)=30V, Max Surge Current=5.5A, Mount="Surface Mount", Number of Pins=2, Output Current=500mA, Packaging="Tape and Reel", Peak Non-Repetitive Surge Current=5.5A, Peak Reverse Current=130uA, Polarity=Standard, Radiation Hardening=No, REACH SVHC="No SVHC", Voltage Rating (DC)=30V, Weight=0.03g, Width=1.6mm
D4 D5 D6 D7: library part CMP-06195-000011-1, "TVS DIODE 15V 1005", Case Code (Imperial)=0402, Case Code (Metric)=1005, LCSC=C191267, Max Operating Temperature=85°C, Min Operating Temperature=-40°C, Power Line Protection=No, Resistor Type=Zener, Reverse Standoff Voltage=15V, Case/Package=0402, Mount="Surface Mount", Number of Bidirectional Channels=1, Packaging="Tape and Reel"
J1: "XFCN F0501-T-24-20T-R 0.5mm fpc top contacts, slide retentioner", LCSC=C840496
J3: library part "MuseLab CMSIS-DAP probe receiving connector"
J8: library part CMP-2000-05527-1, "Terminal Block, Pitch 4 mm, 1 x 2 Position, Height 4.5 mm, -60 to 105 degC, RoHS, Tape and Reel", Colour=White, Manufacturer=WAGO, Nominal current=9A, Nominal voltage=160V, Package Description="Terminal Block, Pitch 4 mm, 1 x 2 Position, Height 4.5 mm", Package Reference=2060-452, AWG=24-18, Connection=Pullspring, Contact material=Tinplated, Content=1pc(s), Datasheet URL=http://www.wago.com/infomaterial/pdf/60255126.pdf, Datasheet Version=03/2015, Height=4.5mm, Length=7.9mm, Manufacturer part No.=2060-452/998-404, Manufacturer URL=http://global.wago.com/en/index-en.jsp, Material=PPA-GFenclosure·Tin-platedcoppercontacts, Max. cross section (flexible)=0.75mm², Max. cross section (inflexible)=0.75mm², Min. cross section (flexible)=0.25mm², Min. cross section (unflexible)=0.2mm², Mounting Technology=SurfaceMount, Number of contacts=2, Pitch=4mm, Stripping length=6-7mm, Type=2060-452/998-404, Width=10.1mm
L1: library part CMP-06042-000782-1, "CMI322513J680MT 1210 chip SMD inductor 68uH", LCSC=C401470
LED1 LED2 LED3 LED4 LED5 LED6: "reverse mount SMD led, cool white", LCSC=C414638
Q1 Q3: library part CMP-83955-000006-1, "BORN BM3402 MOSFET N-CH 30V 5.1A SOT23", LCSC=C431498
Q2: library part CMP-2000-05778-1, "P-Channel MOSFET, 30 V, 4 A, -55 to 150 degC, 3-Pin SOT-23-3L, RoHS, Tape and Reel", Continuous Drain Current=4A, Drain-Source On-Volt=30V, Frequency (Max)=NotRequiredMHz, Gate-Source Voltage (Max)=?12V, LCSC=C15127, Manufacturer="Alpha and Omega", Operating Temp Range=-55Cto150C, Operating Temperature Classification=Military, Output Power (Max)=NotRequiredW, Package Description="3-Pin Small Outline Transistor, Body 2.95 x 1.6 mm, Pitch 0.95 mm", Package Reference=SOT-23-3L, Package Type=SOT-23, Power Dissipation=1.4W, Power Gain=NotRequireddB, Channel Mode=Enhancement, Datasheet URL=http://www.aosmd.com/res/data_sheets/AO3401A.pdf, Datasheet Version="Rev. 3, 03/2011", Drain Current (Max)=4A, Drain Efficiency=NotRequired%, Drain-Source On-Res=0.044ohm, Manufacturer URL=http://www.aosmd.com/, Mounting=SurfaceMount, Mounting Technology=SurfaceMount, Noise Figure=NotRequireddB, Number of  Elements=1, Package URL=http://www.aosmd.com/res/packaging_information/SOT-23-3L.pdf, Pin Count=3, Polarity=P, Rad Hardened=No, Type=PowerMOSFET
R1 R2 R10 R12 R13 R34 R35 R36 R37 R38 R39: library part CMP-2000-00540-1, LCSC=C23186, Manufacturer=UNI_ROYAL, Part Number=0603WAF5101T5E
R3: library part CMP-2000-00787-1, LCSC=C22939, Manufacturer=UNI-ROYAL, Part Number=0603WAF220KT5E
R4 R11 R14 R15 R20 R22 R24 R26 R28 R30 R32: library part CMP-1012-00849-2, LCSC=C22935, Manufacturer=Panasonic, Part Number=0603WAF1004T5E
R5 R8 R9 R17 R18 R19 R21 R40: library part CMP-2000-00540-1, LCSC=C22843, Manufacturer=UNI_ROYAL, Part Number=0603WAF5101T5E
R6: library part CMP-2000-00540-1, LCSC=C22961, Manufacturer=UNI_ROYAL, Part Number=0603WAF2203T5E
R7: library part CMP-2000-00540-1, LCSC=C23242, Manufacturer=UNI_ROYAL, Part Number=0603WAF7502T5E
R23 R25 R27 R29 R31 R33: library part CMP-2000-00540-1, LCSC=C22859, Manufacturer=UNI_ROYAL, Part Number=0603WAF100JT5E
SW1 SW2 SW3 SW4 SW5 SW6: "SKRB series SMD tactile button Alps Alpine", LCSC=C139790, ComponentLink1Description=Datasheet, ComponentLink1URL=https://tech.alpsalpine.com/prod/e/html/tact/surfacemount/skrb/skrbake010.html, Variant=SKRBAKE010
SW7 SW8: library part CMP-1696-00003-1, "XKB TS-1187A-B-A-B C318884", LCSC=C318884
TP1 TP2 TP3 TP4 TP5 TP6 TP8 TP9 TP10 TP11 TP12 TP13 TP14 TP15 TP16 TP17 TP18 TP19: library part "Test Point", "Test point ,1.5mm diameter, no hole", Category=testpoints
U2: "1s Lithium linear battery charger, 1A output", LCSC=C16581, ComponentLink1Description=Datasheet, ComponentLink1URL=https://static.chipdip.ru/lib/977/DOC002977110.pdf
U3: library part ESP32-S2-MINI-1, "WiFi 802.11b/g/n Transceiver Module 2.412GHz ~ 2.484GHz Antenna Not Included Surface Mount", LCSC=C3013906, Package="NON STANDARD-65 Espressif Systems", Availability="In Stock", Check_prices=https://www.snapeda.com/parts/ESP32-S2-MINI-1/Espressif+Systems/view-part/?ref=eda, MF="Espressif Systems", MP=ESP32-S2-MINI-1, Price=None, Purchase-URL=https://pricing.snapeda.com/search/part/ESP32-S2-MINI-1/?ref=eda, SnapEDA_Link=https://www.snapeda.com/parts/ESP32-S2-MINI-1/Espressif+Systems/view-part/?ref=snap
U7: library part CMP-144040-000003-1, "SENSOR HUMI/TEMP I2C 2% SMD", LCSC=C2880044, Manufacturer=Sensirion, Max Supply Voltage=3.6V, Min Supply Voltage=1.62V, Operating Supply Current=0.3-900uA, Package=0, Temperature="-40°C to +125°C", Temperature Range High=+125°C, Temperature Range Low=-40°C, Accuracy=2%, Automotive=No, Category=IC, ComponentLink2Description=Datasheet, ComponentLink2URL=https://www.sensirion.com/fileadmin/user_upload/customers/sensirion/Dokumente/0_Datasheets/Humidity/Sensirion_Humidity_Sensors_SHTC3_Datasheet.pdf, Device Class L1=Sensors, Device Class L2="Temperature and Humidity Sensors", Device Class L3=unset, Digikey Description="SENSOR HUMI/TEMP I2C 2% SMD", Height=0.75mm, Interface=I2C, Ipc Land Pattern Name=DFN200X200X75-4, Lead Free=Yes, Manufacturer Part Number=SHTC3, Mouser Description="SHTC3 Series 0 to 100% RH 3.6 V Humidity and Temperature Sensor IC - DFN-4", Octopart=https://octopart.com/shtc3-sensirion-91912225, Resolution=16bits, RoHS=TRUE, Sensor Output=I2C
U8: "Diodes Inc AP7365 LDO, fast transient, 600mA"
U9: "XYSEMI 1s Li-Ion integrated protection IC", LCSC=C2681922

## Free pads (board coordinates)
  round 0 hole 1.152 unplated mask+0.148: TH1(-38,-38.3) TH2(38,-38.3) TH3(0,36)

## Via types
v1: diameter 0.5, hole 0.3, Top Layer to Bottom Layer, tented both sides, 350 vias
v2: diameter 0.6, hole 0.4, Top Layer to Bottom Layer, tented both sides, 6 vias

## Nets (pads, with @x,y where several pads share a name; then routed paths per layer and width w, separated by ;. In a path a pad name is that pad's centre, name@x,y a point inside that pad or via, vN(x,y) a via of type N, cw(c..) or ccw(c..) an arc to the next point about the centre after c; other vN are vias at no path point)
+3V3: C2.1 C6.1 C17.1 C18.1 C19.1 C27.1 C28.1 C29.1 J1.15 J1.16 J2.1 J2.2 J4.1 J4.2 J6.1 L1.1 R6.2 R17.2 R18.2 R20.1 R21.2 SW1.2 SW2.2 SW3.2 SW4.2 SW5.2 SW6.2 U3.3 U7.1 U8.5 | length 331.8
  Top Layer w0.2: U7.1@-32.6,-38 -31.75,-38 -31.552,-38.198 C27.1@-30.5,-38.198 ; R18.2@-30.2,-23.925 -30.025,-24.1 R17.2@-28.6,-24.1 -28.6,-23.075 v1(-29.3,-22.375) ; C27.1@-30.175,-37.873 C27.1@-30.5,-38.198 ; v1(-29.05,-38.575) -30.144,-38.575 -30.5,-38.219 C27.1@-30.5,-38.198 ; v1(-28.025,2.175) -27.313,2.175 -24.393,5.096 -24.021,5.096 -22.425,3.5 -21.725,3.5 v1(-21.3,3.925) ; v1(-25.725,22.225) -23.935,22.225 -17.675,15.965 -17.675,6.9 -17.7,6.875 ; v1(-14.325,-33.125) -14.075,-33.375 -6.615,-33.375 -6.19,-32.95 -2.925,-32.95 -2.375,-32.4 -2.375,-28.644 J1.16@-2.35,-28.619 -2.35,-27.6 -2.1,-27.35 -1.85,-27.6 J1.15@-1.85,-28.619 ; R20.1@4.4,-21.375 v1(4.4,-20.525) ; v1(11.375,15.225) 15.125,15.225 v1(15.15,15.2) ; C28.1@15.596,10.275 15.596,10.946 15.875,11.225 R6.2@15.875,12.125 ; v1(19.7,4.6) 19.643,4.543 19.643,3.013 18.509,1.879 17.469,1.879 16.95,1.359 16.95,-9.97 19.455,-12.475 26.075,-12.475 28.55,-14.95 v1(29.325,-14.95) ; v1(23.475,26.3) 21.975,26.3 21.775,26.5 20.09,26.5 17.825,24.235 17.825,16.2 v1(18.325,15.7) 19.05,15.7 19.8,14.95 21.02,14.95 22.75,13.22 22.75,9.05 21.65,7.95 21.325,7.95 v1(20.3,6.925) 21.975,5.25 25.125,5.25 27.25,7.375 v1(29.3,7.375) ; v1(23.475,27.775) 25.053,27.775 25.403,28.125 28.925,28.125 29.3,28.5 v1(29.3,29.625)
  Top Layer w0.3: C6.1@-2.6,-25.027 -2.6,-26.475 -2.1,-26.975 -2.1,-27.35
  Top Layer w0.4: J2.2@-31.175,-17.825 J2.1@-31.175,-16.675 ; C18.1@-30.886,-13.214 -30.733,-13.214 U3.3@-29.375,-11.856 ; C6.1@-2.6,-25.027 -1.734,-25.027 -1.5,-24.793 -1.5,-23.475 0.353,-21.622 0.353,-20.597 0.748,-20.202 1.173,-20.202 C2.1@1.7,-19.674 ; L1.1@-0.499,-17.85 -0.499,-18.526 -0.022,-19.003 0.978,-19.003 1.649,-19.674 C2.1@1.7,-19.674 ; v1(1.675,-17.575) 1.675,-19.649 C2.1@1.7,-19.674 ; v1(2.8,-14.625) 3.45,-14.625 6.401,-11.674 6.401,-9.549 10.725,-5.225 10.725,-1.5 6.5,2.725 6.5,6.875 ; J6.1@9.15,18.075 11.356,15.869 11.356,15.244 v1(11.375,15.225) ; J4.2@13.15,12.1 J4.1@14.3,12.1
  Top Layer w0.5: J4.1@14.3,12.1 14.15,11.95 14.15,11.2 14.079,11.129 14.079,10.554 C29.1@13.738,10.213 ; C28.1@15.367,10.069 C28.1@15.511,10.213 ; U8.5@15.375,8.75 15.375,10.069 C28.1@15.519,10.213 ; C29.1@13.738,10.213 C28.1@15.511,10.213 ; C29.1@13.738,10.213 13.512,10.213 C29.1@13.45,10.151 13.676,10.151 C29.1@13.738,10.213 ; C28.1@15.511,10.213 C28.1@15.519,10.213 ; C28.1@15.511,10.213 15.573,10.275 C28.1@15.581,10.275 ; C28.1@15.519,10.213 C28.1@15.581,10.275 ; C28.1@15.519,10.213 15.534,10.213 C28.1@15.596,10.275 C28.1@15.581,10.275
  Top Layer w0.6: J2.2@-31.175,-17.825 -31.075,-17.725 -30.426,-17.725 -30.075,-17.374 v1(-30.075,-14.425) -30.075,-14.4 v1(-29.675,-14) ; J2.1@-31.175,-16.601 J2.1@-31.175,-16.675 -31.249,-16.601 -31.249,-15.851 C17.1@-32.127,-14.973 -31.967,-14.813 -31.967,-14.295 C18.1@-30.886,-13.214
  Top Layer w0.8: R21.2@-20.377,2.977 -20.365,2.99 v1(-20.875,3.5) v1(-21.3,3.925) -21.525,4.15 -21.525,5.6 -20.25,6.875 -17.7,6.875 6.5,6.875 10.81,11.185 ; v1(11.375,10.621) 10.81,11.185 ; J4.2@13.15,12.1 11.725,12.1 10.81,11.185
  Top Layer w1: C19.1@11.2,9.126 11.353,9.279 12.351,9.279 13.224,10.151 C29.1@13.45,10.151
  Bottom Layer w0.2: v1(-29.675,-14) -28.5,-14 -27.75,-14.75 -27.75,-19.875 -27.95,-20.075 -29.3,-20.075 v1(-29.3,-22.375) ; SW5.2@-29.3,2.225 -29.25,2.175 v1(-28.025,2.175) ; SW6.2@-29.3,24.525 -28.767,23.992 -28.767,23.642 -27.35,22.225 v1(-25.725,22.225) ; v1(-29.05,-38.575) -28.5,-38.025 -16.4,-38.025 -14.337,-35.963 -14.337,-33.138 v1(-14.325,-33.125) ; v1(15.15,15.2) 16.5,15.2 17,15.7 v1(18.325,15.7) ; v1(19.7,4.6) 20.3,5.2 v1(20.3,6.925) ; v1(23.475,26.3) v1(23.475,27.775) ; SW3.2@29.3,-16.025 29.325,-16 v1(29.325,-14.95) ; SW2.2@29.3,6.275 v1(29.3,7.375) ; SW1.2@29.3,28.575 v1(29.3,29.625)
  Bottom Layer w0.4: v1(1.675,-17.575) 2.8,-16.45 ; v1(2.8,-14.625) 2.8,-16.45 ; v1(4.4,-20.525) 4.4,-18.05 2.8,-16.45 ; v1(11.375,10.621) v1(11.375,15.225)
  Bottom Layer w0.8: v1(-30.075,-14.425) -29.975,-14.325 -29.975,-14.3 v1(-29.675,-14) -29.675,-7.984 -20.525,1.166 -20.525,1.326 -20.486,1.365 -20.486,3.111 v1(-20.875,3.5) v1(-21.3,3.925)
+V_SPLY: D8.1 D9.2 D10.1 Q2.1 R10.2 R11.1 | length 10.6
  Top Layer w0.6: Q2.1@24.195,-2.698 25.026,-1.868 25.843,-1.868 D9.2@25.923,-1.948 26.073,-2.098 26.073,-2.577 D10.1@26.773,-3.277 26.773,-3.302 28.198,-4.727 28.198,-4.88 27.375,-5.704 27.375,-6.938 27.848,-7.411 R11.1@27.848,-7.552 27.848,-7.565 28.798,-8.515 R10.2@28.798,-8.527 R10.2@28.798,-8.54
+Vbat: B1.POS C15.1 D11.2 J5.1 J5.2 Q2.3 R9.2 R15.2 R40.2 U2.5 | length 179.5
  Top Layer w0.2: R40.2@-12.223,27.523 -12.223,27.443 R9.2@-11.177,26.398
  Top Layer w0.4: R40.2@-12.223,27.523 -17.225,22.52 -17.225,8.35 -16.5,7.625 6.189,7.625 8.782,10.218 ; R15.2@7.877,11.102 8.762,10.218 8.782,10.218 ; J5.1@32.325,-26.275 J5.2@33.138,-27.088 ; 34.182,-26.045 33.445,-26.045 29.425,-22.025 28.369,-22.025 16.425,-10.081 16.425,1.471 17.283,2.329 17.929,2.329 18.975,3.375 18.975,5.275 18.65,5.6 18.65,7.608 20.492,9.45 21.016,9.45 21.25,9.684 21.25,12.589 20.389,13.45 12.014,13.45 8.782,10.218
  Top Layer w0.8: D11.2@19.552,-1.823 20.503,-2.775 20.878,-2.775 Q2.3@21.826,-3.724 18.3,-7.25 18.3,-9.411 20.014,-11.125 24.6,-11.125 25.1,-10.625 29.425,-10.625 31.35,-12.55 31.35,-15.372 30.725,-15.997 30.725,-21.925 34.182,-25.382 34.182,-26.045 J5.2@33.138,-27.088 ; U2.5@29.425,-39.505 31.046,-39.505 31.449,-39.102 C15.1@31.449,-39.075
  Top Layer w1: B1.POS@28.52,-29.52 29.08,-29.52 J5.1@32.325,-26.275 ; C15.1@31.449,-39.075 31.601,-38.922 31.601,-38.696 33.225,-37.072 33.225,-32.075 34.425,-30.875 34.425,-28.375 J5.2@33.138,-27.088
+Vbus: C14.1 CN1.A4 CN1.A9 CN1.B4 CN1.B9 D6.2 D8.2 R12.2 U2.4 | length 112.4
  Top Layer w0.2: CN1.B4@-21.25,-34.15 CN1.B4@-21.19,-34.09 ; CN1.A9@-20.95,-34.15 CN1.A9@-21.01,-34.09 ; 9.575,-34.5 9.6,-34.475 R12.2@9.6,-31.675 ; C14.1@22.2,-39.1 C14.1@22.2,-38.874 ; CN1.B4@-21.19,-34.09 -21.19,-33.215 -21.1,-33.125 -21.01,-33.215 CN1.A9@-21.01,-34.09 ; CN1.B4@-21.19,-34.09 CN1.A9@-21.01,-34.09
  Top Layer w0.3: CN1.A4@-26.05,-34.15 -26.04,-34.14 -26.04,-33.144 v1@-25.9,-33.004 ; v1(-25.9,-32.95) v1@-25.9,-33.004 ; CN1.B9@-25.75,-34.15 -25.76,-34.14 -25.76,-33.144 v1@-25.9,-33.004
  Top Layer w0.5: v1@-21.1,-33.125 -21.1,-32.9 -21.07,-32.87 -18.805,-32.87 -18.488,-33.187 ; D6.2@-17.856,-32.656 -17.956,-32.656 -18.488,-33.187 ; C14.1@22.2,-39.1 22.2,-39.102 22.603,-39.505 U2.4@23.975,-39.505 ; C14.1@22.2,-38.874 20.851,-37.525 20.175,-37.525 14.782,-37.525 11.757,-34.5 9.575,-34.5 -5.532,-34.5 -6.007,-34.975 -14.875,-34.975 -15.275,-35.375 -16.3,-35.375 -18.488,-33.187
  Top Layer w0.6: 20.175,-37.525 20.175,-34.65 21.875,-32.95 21.875,-29.4 28.2,-23.075 29.45,-23.075 v1(30.375,-24) ; D8.2@25.752,-7.198 25.752,-7.248 24.975,-8.024 24.975,-8.95 25.8,-9.775 29.777,-9.775 32.2,-12.198 32.2,-15.724 31.575,-16.349 31.575,-21.573 32.677,-22.675 v1(33.1,-22.675)
  Bottom Layer w0.4: v1(-25.9,-32.95) -25.9,-34.575 -24.675,-35.8 -22.325,-35.8 -21.1,-34.575 v1(-21.1,-32.959)
  Bottom Layer w0.6: v1(30.375,-24) 31.775,-24 v1(33.1,-22.675)
+VDC_IN: D10.2 J8.2 | length 27.1
  Top Layer w0.6: J8.2@2.822,-6.625 2.822,-6.895 5.55,-9.623 v1(5.55,-10.575) ; v1(8.525,-10.6) 8.525,-10.125 11.086,-7.564 13.239,-7.564 14.425,-8.75 v1(15.725,-8.75) ; v1(19.3,-8.75) 21.3,-8.75 D10.2@24.327,-5.723
  Bottom Layer w0.6: v1(5.55,-10.575) 5.575,-10.6 v1(8.525,-10.6) ; v1(15.725,-8.75) v1(19.3,-8.75)
+VSYS: C3.1 D9.1 D11.1 Q2.2 U8.1 U8.3 | length 24.4
  Top Layer w0.3: 15.575,3.05 15.654,3.129 18.021,3.129 18.475,3.582 18.475,4.575 17.275,5.775 U8.3@17.275,6
  Top Layer w0.6: U8.1@15.375,6 15.375,4.173 C3.1@15.423,4.125 15.575,3.973 15.575,3.05 v1(15.575,-1.05) ; v1(18.6,-1.05) 19.025,-1.05 19.65,-0.425 20.95,-0.425 D11.1@21.998,0.623
  Top Layer w0.8: D11.1@21.998,0.623 22.011,0.623 22.35,0.962 23,0.962 23.464,0.498 D9.1@23.477,0.498 23.725,0.25 23.725,-0.45 23.275,-0.9 23.275,-0.931 Q2.2@22.852,-1.355
  Bottom Layer w0.6: v1(15.575,-1.05) v1(18.6,-1.05)
BAT_NEG: B1.NEG D7.1 Q1.3 | length 16.5
  Top Layer w0.3: D7.1@-19.437,34.463 -17.575,32.601 Q1.3@-17.575,32.425
  Top Layer w1: B1.NEG@-28.52,27.52 -24.891,31.15 -18.85,31.15 -17.575,32.425 Q1.3@-17.103,32.897
BTN_1: R22.1 U3.9 | length 96.2
  Top Layer w0.2: U3.9@-25.496,-15.19 -25.496,-15.168 -24.85,-14.522 v1(-24.85,-14.5) ; v1(-22.17,6.073) -23.575,7.478 -23.575,9.598 -22.698,10.475 v1(-18.175,10.475) ; v1(-16.625,10.475) -15.55,10.475 -14.525,9.45 -9.15,9.45 -9.125,9.425 -9.035,9.425 -8.735,9.125 -1.825,9.125 4.95,15.9 7.815,15.9 9.115,14.6 16.6,14.6 17.125,15.125 17.125,24.525 19.8,27.2 R22.1@26.65,27.2
  Bottom Layer w0.2: v1(-24.85,-14.5) -24.875,-14.475 -24.875,-13.24 -19.7,-8.065 -19.7,-1.84 -18.525,-0.665 -18.525,4.472 -20.092,6.039 -22.136,6.039 v1(-22.17,6.073) ; v1(-18.175,10.475) v1(-16.625,10.475)
BTN_2: R24.1 U3.10 | length 97
  Top Layer w0.2: U3.10@-24.896,-15.769 -24.25,-15.123 v1(-24.25,-15.1) ; v1(-21.717,6.539) -23.225,8.047 -23.225,9.453 -22.553,10.125 -19.875,10.125 -19.55,9.8 -18.2,9.8 v1(-18.175,9.825) ; v1(-16.625,9.825) -15.45,9.825 -14.7,9.075 -9.18,9.075 -8.88,8.775 -1.68,8.775 5.095,15.55 7.67,15.55 8.97,14.25 20.72,14.25 22.05,12.92 22.05,9.353 21.347,8.65 20.823,8.65 19.45,7.277 19.45,6.167 20.717,4.9 R24.1@26.65,4.9
  Bottom Layer w0.2: v1(-24.25,-15.1) -24.3,-15.05 -24.3,-13.16 -19.35,-8.21 -19.35,-1.985 -18.175,-0.81 -18.175,4.617 -20.057,6.499 -21.677,6.499 v1(-21.717,6.539) ; v1(-18.175,9.825) v1(-16.625,9.825)
BTN_3: R26.1 U3.25 | length 115.2
  Top Layer w0.2: v1(-21.257,6.999) -21.799,7.541 -22.223,7.541 -22.875,8.192 -22.875,9.308 -22.408,9.775 -20.174,9.775 -19.574,9.175 v1(-18.175,9.175) ; v1@-18.8,-3.7 -18.815,-3.7 -19.5,-4.385 -19.5,-5.4 -18.8,-6.1 -18.5,-6.1 -15.8,-8.8 -15.8,-12.561 U3.25@-14.985,-13.376 ; v1(-16.625,9.175) -15.725,9.175 -15.275,8.725 -9.325,8.725 -9.025,8.425 -1.535,8.425 5.24,15.2 7.525,15.2 8.825,13.9 20.575,13.9 21.7,12.775 21.7,9.498 21.202,9 20.678,9 19.1,7.422 19.1,6.022 20.2,4.922 20.2,3.075 18.654,1.529 17.614,1.529 17.3,1.214 17.3,-9.825 19.6,-12.125 R26.1@27.55,-12.125
  Bottom Layer w0.2: v1(-21.257,6.999) -20.062,6.999 -17.825,4.762 -17.825,-0.955 -19,-2.13 -19,-2.757 -18.79,-2.967 v1(-18.79,-3.675) ; v1(-18.175,9.175) v1(-16.625,9.175)
BTN_4: R28.1 U3.5 | length 8.9
  Top Layer w0.2: R28.1@-28.825,-20.925 -28.825,-17.75 -28.65,-17.575 -28.65,-16.775 -29.012,-16.413 -29.212,-16.413 -29.475,-16.15 -29.475,-14.6 -29.011,-14.136 -29.011,-13.896 U3.5@-28.172,-13.058
BTN_5: R30.1 U3.18 | length 34.4
  Top Layer w0.2: R30.1@-26.55,5.7 -23.375,5.7 v1(-22.45,4.775) ; v1(-20.65,-2.675) -19.85,-3.475 -19.85,-5.545 -18.88,-6.515 -18.58,-6.515 -16.15,-8.945 -16.15,-11.85 -20.1,-15.8 -20.1,-16.676 U3.18@-19.192,-17.583
  Bottom Layer w0.2: v1(-22.45,4.775) -19.818,4.775 -19.225,4.182 -19.225,2.85 -19.375,2.7 -19.375,-0.52 -20.65,-1.795 v1(-20.65,-2.675)
BTN_6: R32.2 U3.8 | length 35.3
  Top Layer w0.2: R32.2@-30.777,7.773 -30.353,7.773 -29.805,7.225 -25.706,7.225 -25.581,7.35 v1(-25.5,7.35) ; U3.8@-26.078,-14.587 -25.442,-13.95 v1(-25.425,-13.95) ; v1(-24.15,6.65) -23.618,6.65 v1(-22.459,5.491)
  Bottom Layer w0.2: v1(-25.5,7.35) -24.8,6.65 v1(-24.15,6.65) ; v1(-25.425,-13.95) -25.43,-13.945 -25.43,-13.3 -20.05,-7.92 -20.05,-1.695 -18.875,-0.52 -18.875,4.327 -19.673,5.125 -22.047,5.125 -22.413,5.491 v1(-22.459,5.491)
CH_CHRG: TP4.1 U2.7 | length 4.3
  Top Layer w0.2: U2.7@29.425,-36.965 30.61,-36.965 30.9,-36.675 TP4.1@30.9,-33.925
CH_ENABLE: R13.2 TP6.1 U2.8 U3.41 | length 78.6
  Top Layer w0.2: U3.41@-17.99,-2.876 -14.65,0.465 v1(-14.65,0.475) ; v1(-11.225,-4.3) -10.85,-4.675 -7.775,-4.675 1.512,-13.963 3.162,-13.963 v1(4.075,-13.05) ; v1(5.625,-15.05) 5.625,-18.325 10.95,-23.65 10.95,-23.657 16.684,-29.391 ; TP6.1@10.975,-33.1 11.05,-33.175 12.925,-33.175 ; R13.2@13.65,-34.475 12.925,-33.75 12.925,-33.175 ; v1(21.05,-30.45) 17.743,-30.45 16.684,-29.391 ; v1(22.6,-30.45) 27.125,-34.975 30.225,-34.975 30.375,-35.125 30.375,-35.578 30.258,-35.695 U2.8@29.425,-35.695 ; 12.925,-33.175 16.684,-29.416 16.684,-29.391
  Bottom Layer w0.2: v1(-14.65,0.475) -11.225,-2.95 v1(-11.225,-4.3) ; v1(4.075,-13.05) 4.132,-13.107 4.132,-13.557 v1(5.625,-15.05) ; v1(21.05,-30.45) v1(22.6,-30.45)
CH_STDBY: TP5.1 U2.6 U3.16 | length 95.1
  Top Layer w0.2: v1(-29.05,-37.675) -28.75,-37.375 -28.75,-32.032 -29.625,-31.157 -29.625,-30.36 -25.59,-26.325 -24.65,-26.325 -19.325,-21 -19.325,-19.95 -20.111,-19.164 U3.16@-20.111,-19.068 ; v1(-16.575,-36.325) -16.125,-35.875 -15.068,-35.875 -14.668,-35.475 -5.8,-35.475 -5.325,-35 11.55,-35 14.575,-38.025 16.4,-38.025 17.775,-39.4 v1(17.775,-40.05) ; U2.6@29.425,-38.235 29.85,-38.235 30.528,-37.557 30.918,-37.557 v1(30.975,-37.5) 31.55,-37.5 31.825,-37.225 TP5.1@31.825,-35.35
  Bottom Layer w0.2: v1(-29.05,-37.675) -17.925,-37.675 v1(-16.575,-36.325) ; v1(17.775,-40.05) 18.175,-40.45 30,-40.45 30.975,-39.475 v1(30.975,-37.5)
DISP_BS: J1.8 R4.2 | length 2.5
  Top Layer w0.2: J1.8@1.65,-28.619 1.65,-27.15 1.998,-26.802 2.422,-26.802 2.448,-26.827 R4.2@2.473,-26.852
DISP_BUSY: J1.9 TP14.1 U3.11 | length 61.3
  Top Layer w0.2: TP14.1@-31.4,-35.35 -30.501,-35.35 -30.425,-35.426 ; v1(-29.875,-37.05) -29.907,-37.05 -30.425,-36.532 -30.425,-35.426 ; U3.11@-24.566,-16.664 -24.566,-16.687 -25.25,-17.37 -25.25,-24.005 -31.625,-30.38 -31.625,-33.72 -30.425,-34.92 -30.425,-35.35 -30.425,-35.426 ; v1(-15.8,-34.725) -15.768,-34.725 -15.518,-34.475 -6.225,-34.475 -5.75,-34 -1.625,-34 1.15,-31.225 J1.9@1.15,-28.619
  Bottom Layer w0.2: v1(-29.875,-37.05) -29.794,-37.05 -29.669,-37.175 -28.843,-37.175 -28.693,-37.325 -18.4,-37.325 v1(-15.8,-34.725)
DISP_CLK: J1.13 TP17.1 U3.32 | length 33.9
  Top Layer w0.2: -12.298,-8.002 -10.621,-6.325 -8.105,-6.325 3.525,-17.955 3.525,-22.87 2.32,-24.075 2.1,-24.075 TP17.1@1.15,-25.025 -0.85,-27.025 J1.13@-0.85,-28.619